# EAGLE board keyboard (EAGLE 9.2.2)
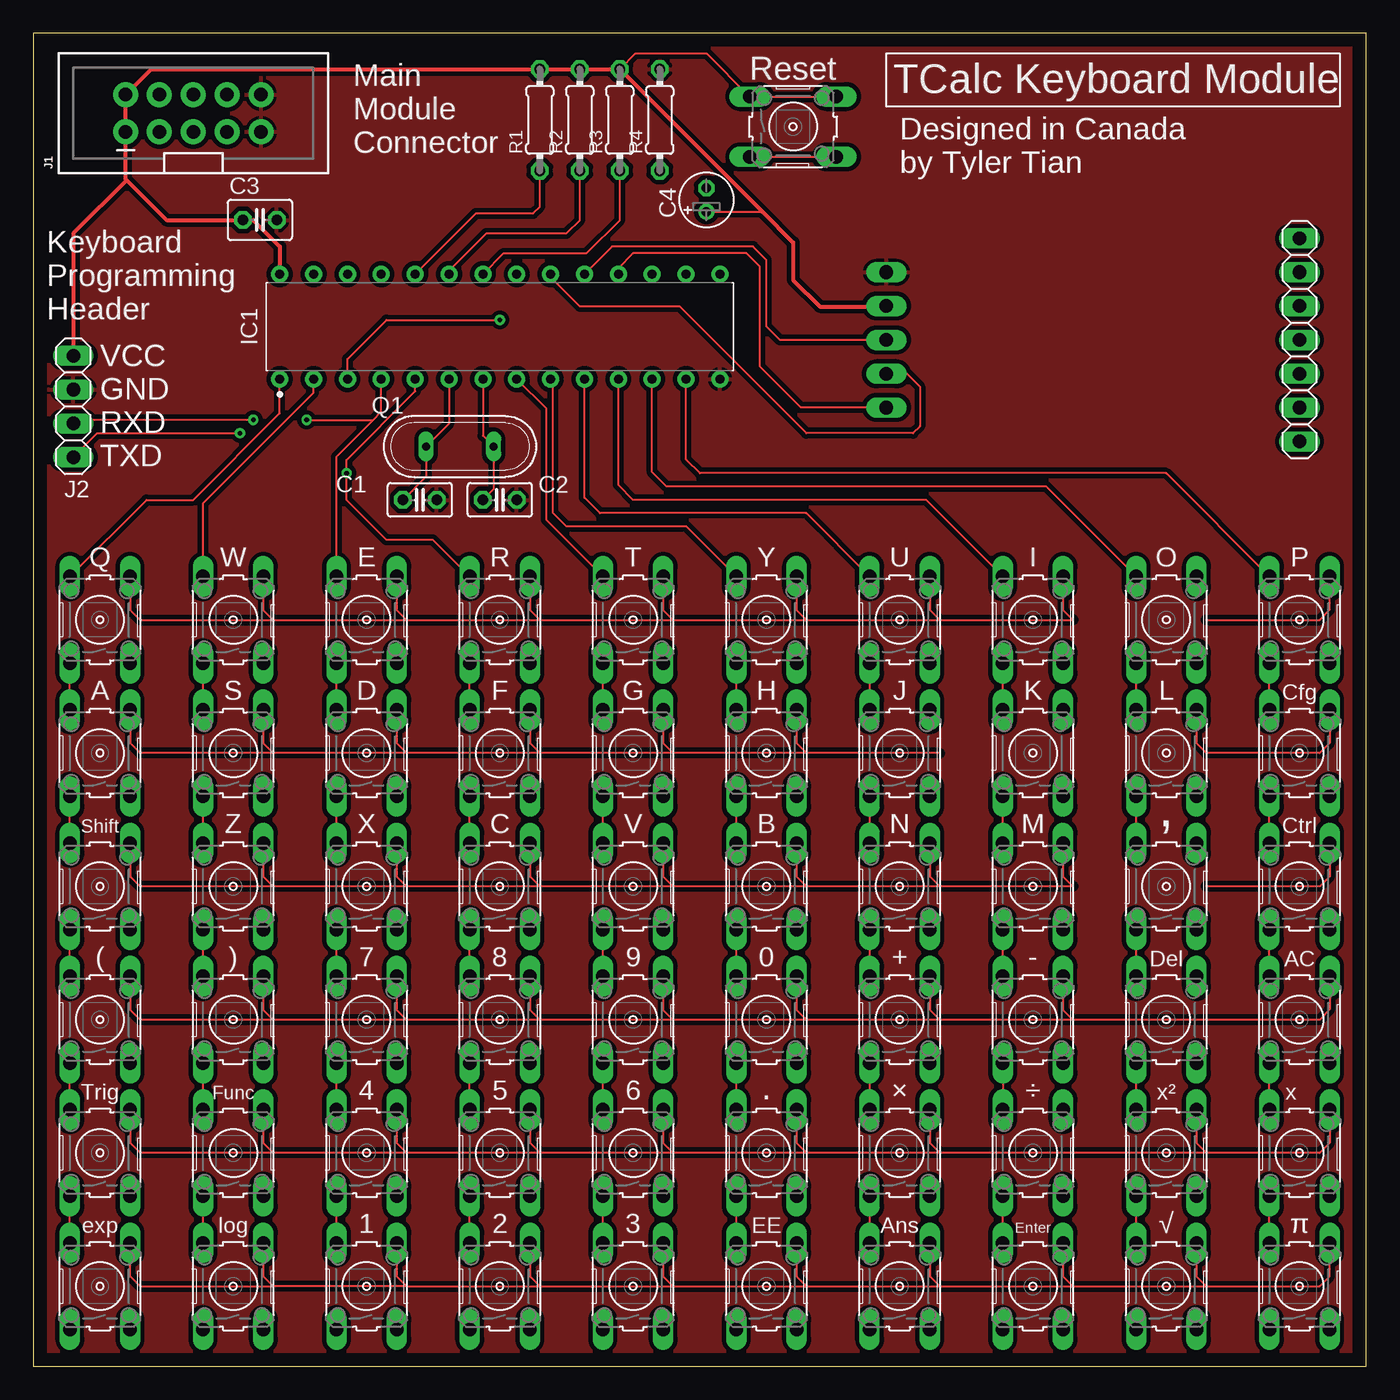
[diagram p0: board, top side]
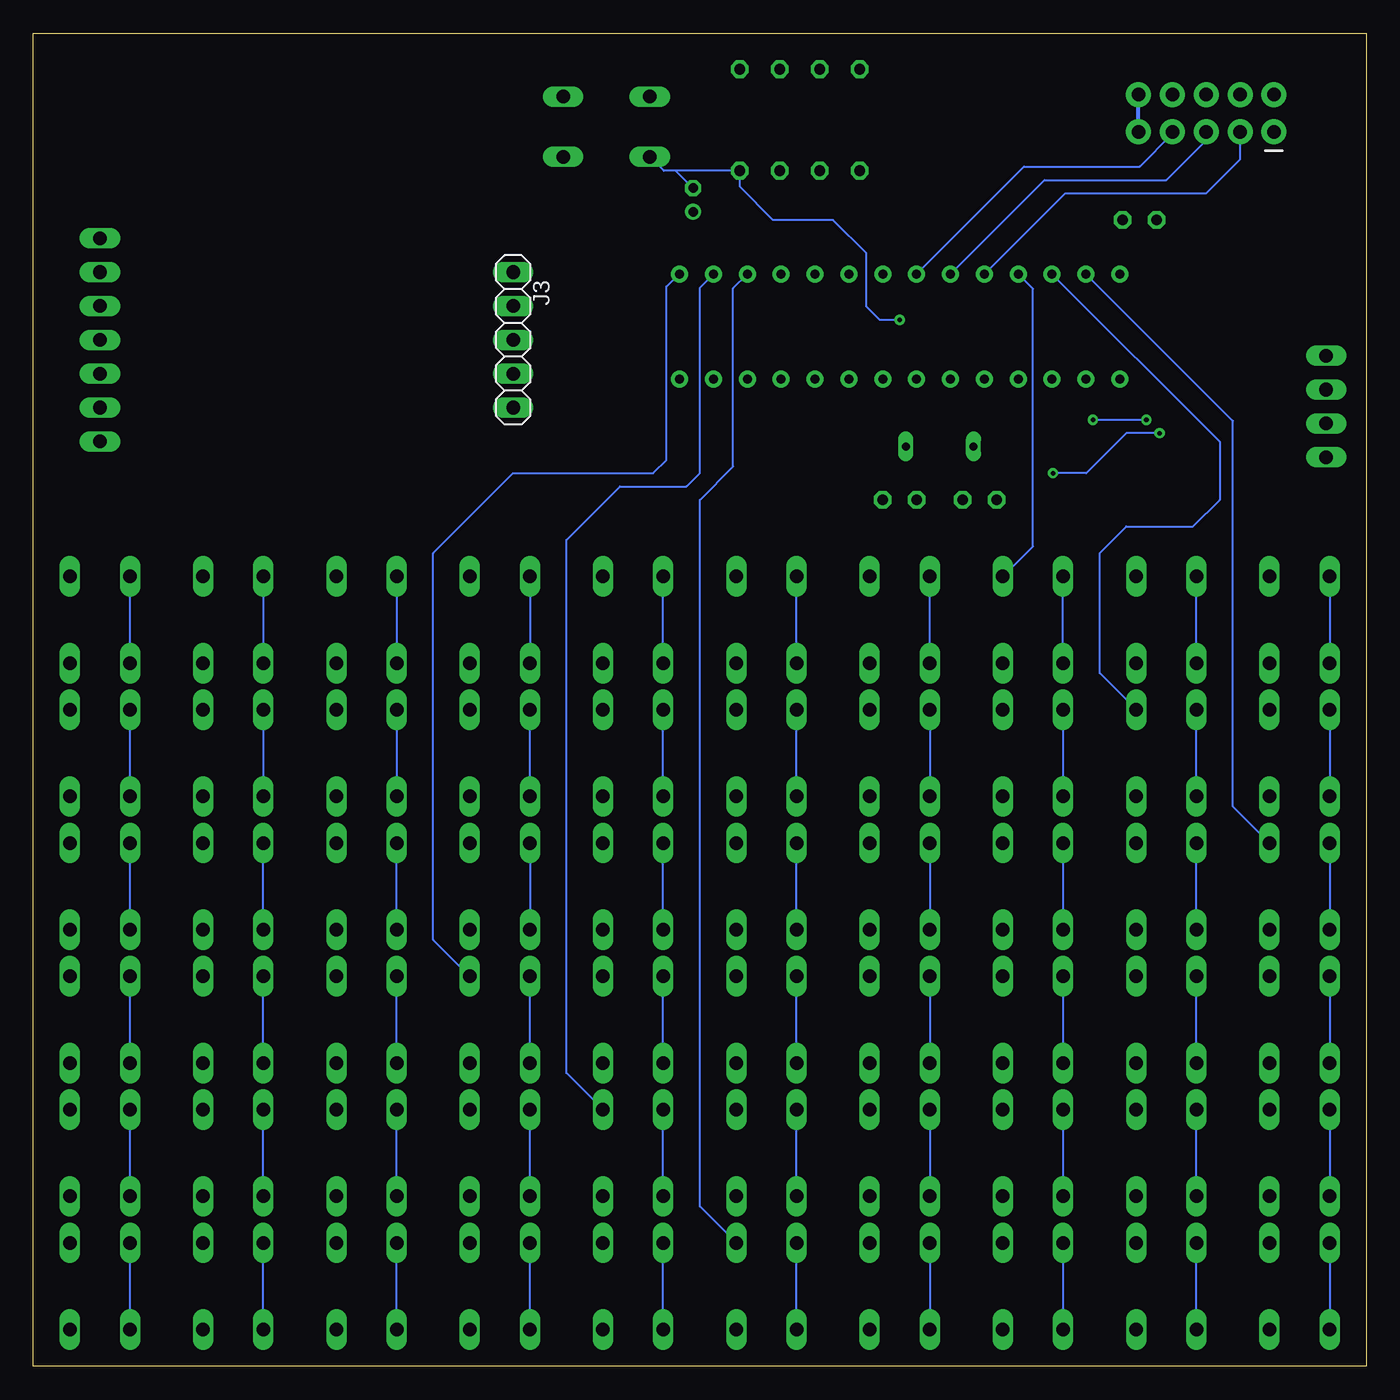
[diagram p1: board, bottom side, seen from below]

Size 100 x 100 mm. Coordinates in mm from the lower left corner, seen from the top.
Outline: 0,0 100,0 100,100 0,100 0,0
Copper layers (1*16): Top 0.035mm / dielectric 1.5mm / Bottom 0.035mm
Design rules "default": minimum track width 6mil, minimum drill 0.35mm, track to track 6mil, track to pad 6mil, pad to pad 6mil, via to via 6mil, smd to smd 6mil, copper to edge 40mil, drill to drill 6mil, minimum pad ring 10mil, minimum via ring 8mil, stop-mask expansion 4mil, vias tented up to drill 0mil, thermal gap 10mil

## Footprints (pad centres in the part's own frame; a part is rotated, then mirrored left to right if it is on the bottom)
C025-025X050 = drill 0.813 octagon: 1 -1.27,0; 2 1.27,0
C025-030X050 = drill 0.813 octagon: 1 -1.27,0; 2 1.27,0
E1,8-4 = drill 0.711 pad 1.168: + -0.889,0 | drill 0.711 pad 1.168 octagon: - 0.889,0
DIP787W45P254L3505H508Q28B = drill 0.673 pad 1.273: 1 -3.937,16.51; 2 -3.937,13.97; 3 -3.937,11.43; 4 -3.937,8.89; 5 -3.937,6.35; 6 -3.937,3.81; 7 -3.937,1.27; 8 -3.937,-1.27; 9 -3.937,-3.81; 10 -3.937,-6.35; 11 -3.937,-8.89; 12 -3.937,-11.43; 13 -3.937,-13.97; 14 -3.937,-16.51; 15 3.937,-16.51; 16 3.937,-13.97; 17 3.937,-11.43; 18 3.937,-8.89; 19 3.937,-6.35; 20 3.937,-3.81; 21 3.937,-1.27; 22 3.937,1.27; 23 3.937,3.81; 24 3.937,6.35; 25 3.937,8.89; 26 3.937,11.43; 27 3.937,13.97; 28 3.937,16.51
2X5-SHROUDED_LOCK = drill 1.016 pad 1.88: 1 -1.397,5.08; 2 1.397,5.08; 3 -1.397,2.54; 4 1.397,2.54; 5 -1.397,0; 6 1.397,0; 7 -1.397,-2.54; 8 1.397,-2.54; 9 -1.397,-5.08; 10 1.397,-5.08
1X04 = drill 1.016 long: 1 -3.81,0; 2 -1.27,0; 3 1.27,0; 4 3.81,0
1X05 = drill 1.016 long: 1 -5.08,0; 2 -2.54,0; 3 0,0; 4 2.54,0; 5 5.08,0
1X07 = drill 1.016 long: 1 -7.62,0; 2 -5.08,0; 3 -2.54,0; 4 0,0; 5 2.54,0; 6 5.08,0; 7 7.62,0
QS = drill 0.61 long: 1 -2.54,0; 2 2.54,0
0204/7 = drill 0.813 octagon: 1 -3.81,0; 2 3.81,0
B3F-10XX = drill 1.016 long: 1 -3.251,2.261; 2 3.251,2.261; 3 -3.251,-2.261; 4 3.251,-2.261

## Placement (x,y rotation side)
C1  30pF  [C025-025X050]  29,65 180 top
C2  30pF  [C025-025X050]  35,65 180 top
C3  0.1uF  [C025-030X050]  17,86 0 top
C4  10uF  [E1,8-4]  50.5,87.5 90 top
IC1  STC12C5616AD  [DIP787W45P254L3505H508Q28B]  35,78 90 top
J1  [2X5-SHROUDED_LOCK]  12,94 90 top
J2  [1X04]  3,72 270 top
J3  [1X05]  64,77 270 bottom
J4  RESERVED  [1X07]  95,77 270 top
Q1  12MHz  [QS]  32,69 0 top
R1  1K  [0204/7]  38,93.5 90 top
R2  1K  [0204/7]  41,93.5 90 top
R3  1K  [0204/7]  44,93.5 90 top
R4  10K  [0204/7]  47,93.5 90 top
S1  [B3F-10XX]  5,56 90 top
S2  [B3F-10XX]  15,56 90 top
S3  [B3F-10XX]  25,56 90 top
S4  [B3F-10XX]  35,56 90 top
S5  [B3F-10XX]  45,56 90 top
S6  [B3F-10XX]  55,56 90 top
S7  [B3F-10XX]  65,56 90 top
S8  [B3F-10XX]  75,56 90 top
S9  [B3F-10XX]  85,56 90 top
S10  [B3F-10XX]  95,56 90 top
S11  [B3F-10XX]  5,46 90 top
S12  [B3F-10XX]  15,46 90 top
S13  [B3F-10XX]  25,46 90 top
S14  [B3F-10XX]  35,46 90 top
S15  [B3F-10XX]  45,46 90 top
S16  [B3F-10XX]  55,46 90 top
S17  [B3F-10XX]  65,46 90 top
S18  [B3F-10XX]  75,46 90 top
S19  [B3F-10XX]  85,46 90 top
S20  [B3F-10XX]  95,46 90 top
S21  [B3F-10XX]  5,36 90 top
S22  [B3F-10XX]  15,36 90 top
S23  [B3F-10XX]  25,36 90 top
S24  [B3F-10XX]  35,36 90 top
S25  [B3F-10XX]  45,36 90 top
S26  [B3F-10XX]  55,36 90 top
S27  [B3F-10XX]  65,36 90 top
S28  [B3F-10XX]  75,36 90 top
S29  [B3F-10XX]  85,36 90 top
S30  [B3F-10XX]  95,36 90 top
S31  [B3F-10XX]  5,26 90 top
S32  [B3F-10XX]  15,26 90 top
S33  [B3F-10XX]  25,26 90 top
S34  [B3F-10XX]  35,26 90 top
S35  [B3F-10XX]  45,26 90 top
S36  [B3F-10XX]  55,26 90 top
S37  [B3F-10XX]  65,26 90 top
S38  [B3F-10XX]  75,26 90 top
S39  [B3F-10XX]  85,26 90 top
S40  [B3F-10XX]  95,26 90 top
S41  [B3F-10XX]  5,16 90 top
S42  [B3F-10XX]  15,16 90 top
S43  [B3F-10XX]  25,16 90 top
S44  [B3F-10XX]  35,16 90 top
S45  [B3F-10XX]  45,16 90 top
S46  [B3F-10XX]  55,16 90 top
S47  [B3F-10XX]  65,16 90 top
S48  [B3F-10XX]  75,16 90 top
S49  [B3F-10XX]  85,16 90 top
S50  [B3F-10XX]  95,16 90 top
S51  [B3F-10XX]  5,6 90 top
S52  [B3F-10XX]  15,6 90 top
S53  [B3F-10XX]  25,6 90 top
S54  [B3F-10XX]  35,6 90 top
S55  [B3F-10XX]  45,6 90 top
S56  [B3F-10XX]  55,6 90 top
S57  [B3F-10XX]  65,6 90 top
S58  [B3F-10XX]  75,6 90 top
S59  [B3F-10XX]  85,6 90 top
S60  [B3F-10XX]  95,6 90 top
S61  [B3F-10XX]  57,93 0 top

## Library data of the parts
C1-C4 = rcl; SPICEPREFIX: C
IC1 = TCalc
J1 = SparkFun-Connectors; PROD_ID: CONN-08671; SF_ID: PRT-08506
J2-J4 = pinhead
Q1 = special
R1-R4 = rcl; SPICEPREFIX: R
S1-S61 = switch-omron; MPN: B3F-1000; OC_FARNELL: 176432; OC_NEWARK: 36M3542

## Nets
BTN: IC1.18 J3.5
COL1: IC1.1 S1.1 S1.2 S11.1 S11.2 S21.1 S21.2 S31.1 S31.2 S41.1 S41.2 S51.1 S51.2
COL2: IC1.2 S2.1 S2.2 S12.1 S12.2 S22.1 S22.2 S32.1 S32.2 S42.1 S42.2 S52.1 S52.2
COL5: IC1.8 S5.1 S5.2 S15.1 S15.2 S25.1 S25.2 S35.1 S35.2 S45.1 S45.2 S55.1 S55.2
COL6: IC1.9 S6.1 S6.2 S16.1 S16.2 S26.1 S26.2 S36.1 S36.2 S46.1 S46.2 S56.1 S56.2
COL7: IC1.10 S7.1 S7.2 S17.1 S17.2 S27.1 S27.2 S37.1 S37.2 S47.1 S47.2 S57.1 S57.2
COL8: IC1.11 S8.1 S8.2 S18.1 S18.2 S28.1 S28.2 S38.1 S38.2 S48.1 S48.2 S58.1 S58.2
COL9: IC1.12 S9.1 S9.2 S19.1 S19.2 S29.1 S29.2 S39.1 S39.2 S49.1 S49.2 S59.1 S59.2
COL10: IC1.13 S10.1 S10.2 S20.1 S20.2 S30.1 S30.2 S40.1 S40.2 S50.1 S50.2 S60.1 S60.2
GND: C1.1 C2.1 C3.2 IC1.14 J1.9 J1.10 J2.2 J3.1 R4.2
N$2: C4.- IC1.3 R4.1 S61.3 S61.4
ROW1: IC1.25 S1.4 S2.4 S3.4 S4.4 S5.4 S6.4 S7.4 S8.4 S9.4 S10.4
ROW2: IC1.26 S11.4 S12.4 S13.4 S14.4 S15.4 S16.4 S17.4 S18.4 S19.4 S20.4
ROW3: IC1.27 S21.4 S22.4 S23.4 S24.4 S25.4 S26.4 S27.4 S28.4 S29.4 S30.4
ROW4: IC1.15 S31.4 S32.4 S33.4 S34.4 S35.4 S36.4 S37.4 S38.4 S39.4 S40.4
ROW5: IC1.16 S41.4 S42.4 S43.4 S44.4 S45.4 S46.4 S47.4 S48.4 S49.4 S50.4
ROW6: IC1.17 S51.4 S52.4 S53.4 S54.4 S55.4 S56.4 S57.4 S58.4 S59.4 S60.4
RXD/COL3: IC1.4 J2.3 S3.1 S3.2 S13.1 S13.2 S23.1 S23.2 S33.1 S33.2 S43.1 S43.2 S53.1 S53.2
SBDI_CLK: IC1.23 J1.5 R2.1
SBDI_DAT: IC1.22 J1.7 R3.1
SBDI_EN: IC1.24 J1.3 R1.1
TXD/COL4: IC1.5 J2.4 S4.1 S4.2 S14.1 S14.2 S24.1 S24.2 S34.1 S34.2 S44.1 S44.2 S54.1 S54.2
VCC: C3.1 C4.+ IC1.28 J1.1 J1.2 J2.1 J3.2 R1.2 R2.2 R3.2 S61.1 S61.2
XAXIS: IC1.19 J3.3
XTAL1: C2.2 IC1.7 Q1.2
XTAL2: C1.2 IC1.6 Q1.1
YAXIS: IC1.20 J3.4

## Tracks (layer width: path | path; a pad name or v marks a point on that pad's centre or on a via)
BTN
  Top 0.152: J3.5 57.58,71.92 54.5,75 54.5,82.5 53.5,83.5 45,83.5 43.89,82.39 IC1.18
COL1
  Top 0.152: S51.2 S41.1 | S41.2 S31.1 | S31.2 S21.1 | S21.2 S11.1 | S11.2 S1.1 | S1.2 8.49,65 12,65 18.49,71.49 IC1.1
  Bottom 0.152: S1.2 S1.1 | S11.2 S11.1 | S21.2 S21.1 | S31.2 S31.1 | S41.2 S41.1 | S51.2 S51.1
COL2
  Top 0.152: S52.2 S42.1 | S42.2 S32.1 | S32.2 S22.1 | S22.2 S12.1 | S12.2 S2.1 | S2.2 12.74,64.74 21.03,73.03 IC1.2
  Bottom 0.152: S52.1 S52.2 | S42.1 S42.2 | S32.1 S32.2 | S22.1 S22.2 | S12.1 S12.2 | S2.1 S2.2
COL5
  Top 0.152: S55.2 S45.1 | S45.2 S35.1 | S35.2 S25.1 | S25.2 S15.1 | S15.2 S5.1 | S5.2 38.5,63.49 38.5,71.83 IC1.8
  Bottom 0.152: S55.1 S55.2 | S45.1 S45.2 | S35.1 S35.2 | S25.1 S25.2 | S15.1 S15.2 | S5.1 S5.2
COL6
  Top 0.152: S56.2 S46.1 | S46.2 S36.1 | S36.2 S26.1 | S26.2 S16.1 | S16.2 S6.1 | S6.2 48.99,63 40,63 39,64 39,73.87 IC1.9
  Bottom 0.152: S56.1 S56.2 | S46.1 S46.2 | S36.1 S36.2 | S26.1 S26.2 | S16.1 S16.2 | S6.1 S6.2
COL7
  Top 0.152: S7.1 S17.2 | S17.1 S27.2 | S27.1 S37.2 | S37.1 S47.2 | S47.1 S57.2 | S7.2 57.99,64 42.5,64 41.35,65.15 IC1.10
  Bottom 0.152: S57.1 S57.2 | S47.1 S47.2 | S37.1 S37.2 | S27.2 S27.1 | S17.1 S17.2 | S7.2 S7.1
COL8
  Top 0.152: S58.2 S48.1 | S38.1 S48.2 | S38.2 S28.1 | S28.2 S18.1 | S18.2 S8.1 | S8.2 66.99,65 45,65 43.89,66.11 IC1.11
  Bottom 0.152: S58.1 S58.2 | S48.1 S48.2 | S28.1 S28.2 | S38.1 S38.2 | S8.2 S8.1 | S18.2 S18.1
COL9
  Top 0.152: S59.2 S49.1 | S49.2 S39.1 | S39.2 S29.1 | S29.2 S19.1 | S19.2 S9.1 | S9.2 75.99,66 47.5,66 46.43,67.07 IC1.12
  Bottom 0.152: S59.1 S59.2 | S49.1 S49.2 | S39.1 S39.2 | S29.1 S29.2 | S9.2 S9.1 | S19.2 S19.1
COL10
  Top 0.152: S60.2 S50.1 | S50.2 S40.1 | S40.2 S30.1 | S30.2 S20.1 | S20.2 S10.1 | S10.2 84.99,67 50,67 48.97,68.03 IC1.13
  Bottom 0.152: S60.1 S60.2 | S50.1 S50.2 | S40.1 S40.2 | S30.1 S30.2 | S20.1 S20.2 | S10.1 S10.2
GND
  Bottom 0.3: J1.9 J1.10
  pour Top (isolate 0.33): 0,100 100,100 100,0 0,0
N$2  (via drill 0.35)
  Top 0.152: S61.3 S61.4 | IC1.3 23.57,75.57 26.5,78.5 v35,78.5
  Bottom 0.152: 51.8,89.69 R4.1 47,88.5 44.5,86 40,86 37.5,83.5 37.5,79.5 36.5,78.5 v35,78.5 | 51.8,89.69 52.7,89.69 S61.3 | 51.8,89.69 C4.-
ROW1
  Top 0.152: S1.4 7.26,56.74 8,56 18,56 | 18,56 28,56 | 28,56 38,56 | 38,56 48,56 | 48,56 58,56 | 58,56 68,56 | 68,56 78,56 77.26,56.74 S8.4 | 88,56 96.5,56 97.26,56.76 S10.4 | S7.4 67.26,56.74 68,56 | S6.4 57.26,56.74 58,56 | S5.4 47.26,56.74 48,56 | S4.4 37.26,56.74 38,56 | S3.4 27.26,56.74 28,56 | S2.4 17.26,56.74 18,56
  Bottom 0.152: S3.4 25,61.51 25,80.83 IC1.25
ROW2
  Top 0.152: S11.4 7.26,46.74 8,46 18,46 | 68,46 58,46 | 58,46 48,46 | 48,46 38,46 | 38,46 28,46 | 28,46 18,46 | S20.4 97.26,46.76 96.5,46 88,46 87.26,46.74 S19.4 | S16.4 57.26,46.74 58,46 | S15.4 47.26,46.74 48,46 | S14.4 37.26,46.74 38,46 | S13.4 27.26,46.74 28,46 | S12.4 17.26,46.74 18,46
  Bottom 0.152: S12.4 20,51.99 20,61 18,63 13,63 11,65 11,69.37 IC1.26
ROW3
  Top 0.152: S21.4 7.26,36.74 8,36 18,36 | 88,36 96.5,36 97.26,36.76 S30.4 | 68,36 78,36 77.26,36.74 S28.4 | 68,36 58,36 | 58,36 48,36 | 48,36 38,36 | 38,36 28,36 | 28,36 18,36 | S26.4 57.26,36.74 58,36 | S27.4 67.26,36.74 68,36 | S25.4 47.26,36.74 48,36 | S24.4 37.26,36.74 38,36 | S23.4 27.26,36.74 28,36 | S22.4 17.26,36.74 18,36
  Bottom 0.152: S21.4 10,41.99 10,70.91 IC1.27
ROW4
  Top 0.152: S31.4 7.26,26.74 8,26 18,26 | 78,26 96.5,26 97.26,26.76 S40.4 | 78,26 68,26 | 68,26 58,26 | 58,26 48,26 | 48,26 38,26 | 38,26 28,26 | 28,26 18,26 | S32.4 17.26,26.74 18,26 | S33.4 27.26,26.74 28,26 | S34.4 37.26,26.74 38,26 | S35.4 47.26,26.74 48,26 | S36.4 57.26,26.74 58,26 | S37.4 67.26,26.74 68,26 | S38.4 77.26,26.74 78,26
  Bottom 0.152: S37.4 70,31.99 70,61 64,67 53.5,67 52.5,68 52.5,81 51.56,81.94 IC1.15
ROW5
  Top 0.152: S41.4 7.26,16.74 8,16 18,16 | 88,16 96.5,16 97.26,16.76 S50.4 | 88,16 68,16 | 68,16 58,16 | 58,16 48,16 | 48,16 38,16 | 38,16 28,16 | 28,16 18,16 | S42.4 17.26,16.74 18,16 | S43.4 27.26,16.74 28,16 | S44.4 37.26,16.74 38,16 | S45.4 47.26,16.74 48,16 | S46.4 57.26,16.74 58,16 | S47.4 67.26,16.74 68,16 | S49.4 87.26,16.74 88,16
  Bottom 0.152: S46.4 60,21.99 60,62 56,66 51,66 50,67 50,80.91 IC1.16
ROW6
  Top 0.152: 28,6 38,6 | 38,6 48,6 | 48,6 58,6 | 58,6 68,6 | 68,6 78,6 | 78,6 88,6 | 88,6 96.5,6 97.26,6.76 S60.4 | S52.4 17.26,6.74 18,6 | S53.4 27.26,6.74 28,6 | S54.4 37.26,6.74 38,6 | S55.4 47.26,6.74 48,6 | S56.4 57.26,6.74 58,6 | S57.4 67.26,6.74 68,6 | S58.4 77.26,6.74 78,6 | S59.4 87.26,6.74 88,6 | S51.4 7.26,6.74 8,6 18,6 | 28,6 18,6
  Bottom 0.152: S55.4 50,11.99 50,65 47.5,67.5 47.5,80.87 IC1.17
RXD/COL3  (via drill 0.35)
  Top 0.152: S53.2 S43.1 | S43.2 S33.1 | S33.2 S23.1 | S23.2 S13.1 | S13.2 S3.1 | S3.2 22.74,68.24 25.5,71 | IC1.4 26.11,71.61 25.5,71 | v16.5,71 3.27,71 J2.3 | v20.5,71 25.5,71
  Bottom 0.152: S3.1 S3.2 | S13.2 S13.1 | S23.2 S23.1 | S33.2 S33.1 | S43.2 S43.1 | S53.2 S53.1 | v16.5,71 v20.5,71
SBDI_CLK
  Top 0.152: IC1.23 31.19,82.19 34,85 40,85 41,86 R2.1
  Bottom 0.152: IC1.23 24.13,89 15,89 12,92 J1.5
SBDI_DAT
  Top 0.152: IC1.22 35.29,83.5 41.5,83.5 44,86 R3.1
  Bottom 0.152: IC1.22 25.67,90 17,90 14.54,92.46 J1.7
SBDI_EN
  Top 0.152: R1.1 38,87 37.5,86.5 33.21,86.5 IC1.24
  Bottom 0.152: IC1.24 22.59,88 12,88 9.46,90.54 J1.3
TXD/COL4  (via drill 0.35)
  Top 0.152: S54.2 S44.1 | S44.2 S34.1 | S34.2 32.74,32.16 32.7,32.2 32.7,32.71 S24.1 | S24.2 S14.1 | S14.2 S4.1 | S4.2 29.99,62 26.5,62 23.5,65 v23.5,67 23.5,68 28.65,73.15 IC1.5 | J2.4 4.81,70 v15.5,70
  Bottom 0.152: S4.1 S4.2 | S14.2 S14.1 | S24.2 S24.1 | S34.2 S34.1 | S44.2 S44.1 | S54.2 S54.1 | v15.5,70 18,70 21,67 v23.5,67
VCC
  Top 0.152: S61.2 S61.1 50.51,98.5 45.19,98.5 R3.2 | C4.+ 54.61,86.61 54.66,86.66
  Top 0.3: 7,89 6.92,89.08 J1.1 J1.2 8.83,97.31 R1.2 R2.2 R3.2 54.66,86.66 57,84.31 57,81.5 59,79.5 63.96,79.5 | 7,89 3,85 J2.1 | 7,89 10,86 C3.1 16.5,86 18.49,84.01 IC1.28
  Top 0.6: 63.96,79.5 J3.2
XAXIS
  Top 0.152: J3.3 56,77 55,78 55,83 54,84 43.41,84 IC1.19
XTAL1
  Top 0.152: IC1.7 33.73,69.81 Q1.2 34.54,65.81 C2.2
XTAL2
  Top 0.152: IC1.6 31.19,70.73 Q1.1 29.46,66.73 C1.2
YAXIS
  Top 0.152: J3.4 65.54,74.46 66.5,73.5 66.5,70.5 66,70 58,70 48.5,79.5 41,79.5 38.81,81.69 IC1.20

## Text on the board
tPlace: TCalc Keyboard Module | Main / Module / Connector | Designed in Canada / by Tyler Tian
tNames: Reset | Keyboard / Programming / Header | VCC | GND | RXD | TXD | Q | W | E | R | T | Y | U | I | O | P | A | S | D | F | G | H | J | K | L | Cfg | Shift | Z | X | C | V | B | N | M | , | Ctrl | ( | ) | 7 | 8 | 9 | 0 | + | - | Del | AC | Trig | Func | 4 | 5 | 6 | . | × | ÷ | x² | xʸ | exp | log | 1 | 2 | 3 | EE | Ans | Enter | √ | π